# EAGLE board Y-babies -- PicAxe v.1.3 (EAGLE 6.5.0)
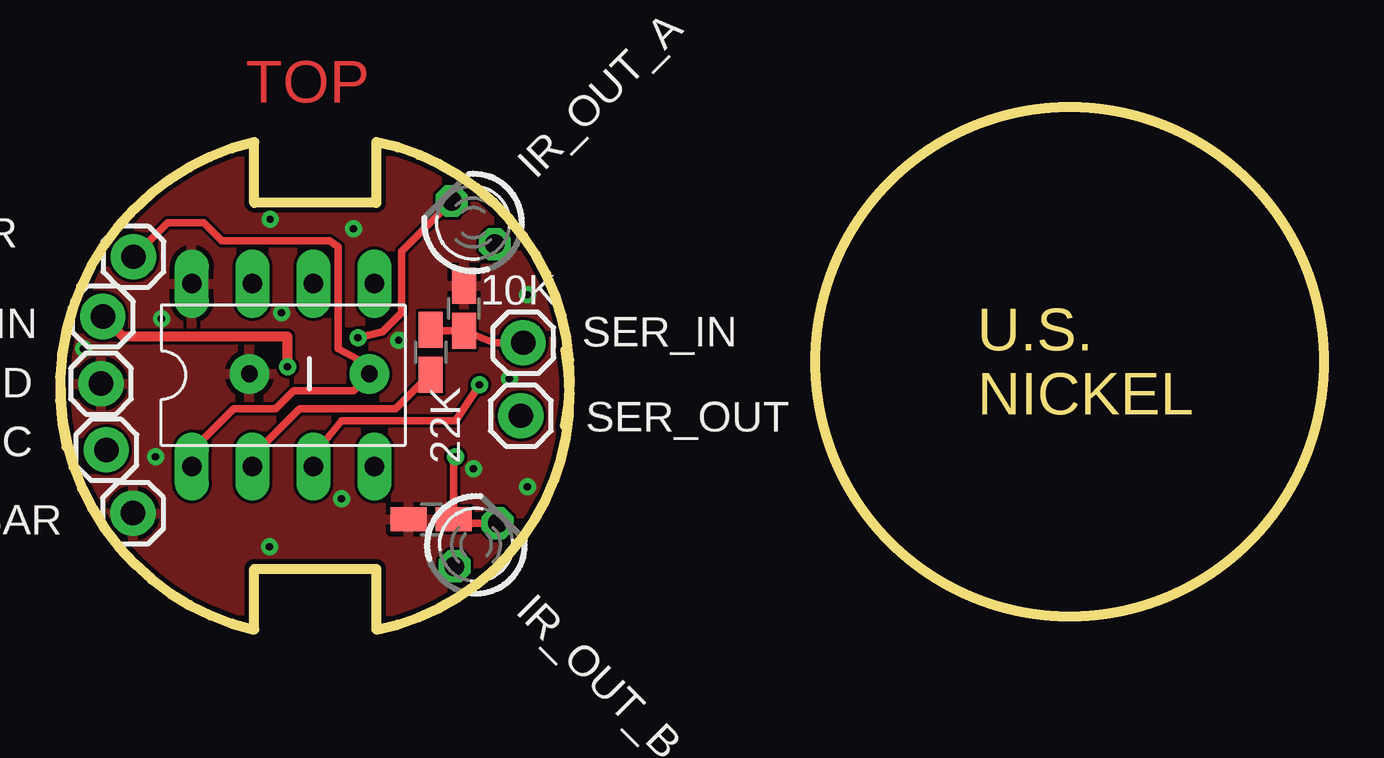
[diagram p0: board, top side]
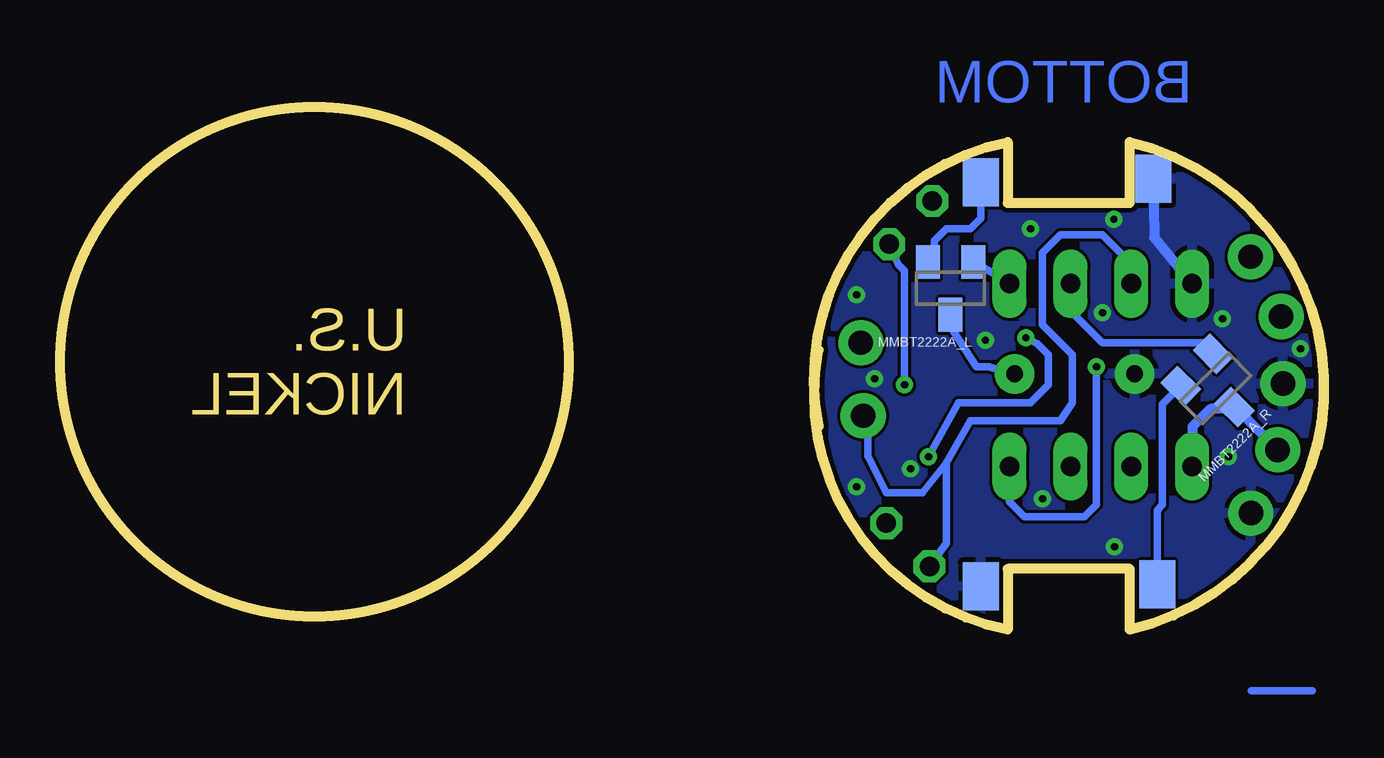
[diagram p1: board, bottom side, seen from below]

Size 52.69 x 21.77 mm. Coordinates in mm from the lower left corner, seen from the top.
Outline: 0.27,7.62 arc-90 8.1,20.32 8.1,17.78 13.18,17.78 13.18,20.32 arc-90 21.06,8.46
Outline: 0.27,12.48 arc90 8.1,0 8.1,2.54 13.18,2.54 13.18,0 arc90 21.07,11.66
Outline: circle at 42.08,11.16 radius 10.61
Copper layers (1*16): Top 0.035mm / dielectric 1.5mm / Bottom 0.035mm
Design rules "default *": minimum track width 10mil, minimum drill 24mil, track to track 5mil, track to pad 5mil, pad to pad 5mil, via to via 5mil, smd to smd 5mil, copper to edge 8mil, drill to drill 6mil, minimum pad ring 10mil, minimum via ring 8mil, stop-mask expansion 4mil, vias tented up to drill 0.3mm, thermal gap 8mil

## Footprints (pad centres in the part's own frame; a part is rotated, then mirrored left to right if it is on the bottom)
R0805W = smd 1.5 x 1: 1 -0.94,0; 2 0.94,0
CAP-PTH-5MM = drill 0.7 pad 1.651: 1 -2.5,0; 2 2.5,0
1X01 = drill 1.016 pad 1.88: 1 0,0
LED3MM = drill 0.813 octagon: A -1.27,0; K 1.27,0
SOT23 = smd 1 x 1.4: 1 -0.95,-1.1; 2 0.95,-1.1; 3 0,1.1
PAD-1.5X4.5 = smd 1.5 x 2: P$1 0,0
DIL8 = drill 0.813 pad 1.422 long: 1 -3.81,-3.81; 2 -1.27,-3.81; 3 1.27,-3.81; 4 3.81,-3.81; 5 3.81,3.81; 6 1.27,3.81; 7 -1.27,3.81; 8 -3.81,3.81

## Placement (x,y rotation side)
10K  [R0805W]  16.84,13.39 90 top
22K  [R0805W]  15.46,11.56 90 top
C1  [CAP-PTH-5MM]  10.39,10.66 0 top
GND  M01PTH  [1X01]  1.71,10.26 0 top
GND_BAR  M01PTH  [1X01]  3.04,4.86 0 top
IR_IN  M01PTH  [1X01]  1.79,13.05 0 top
IR_OUT_A  [LED3MM]  17.22,16.96 135 top
IR_OUT_B  [LED3MM]  17.34,3.54 45 top
MMBT2222A_L  [SOT23]  15.57,14.22 180 bottom
MMBT2222A_R  [SOT23]  4.51,10.05 225 bottom
MOT_1_A  M01SMD-4.5X1.5  [PAD-1.5X4.5]  7.12,18.78 0 bottom
MOT_1_B  M01SMD-4.5X1.5  [PAD-1.5X4.5]  14.29,18.65 180 bottom
MOT_2_A  M01SMD-4.5X1.5  [PAD-1.5X4.5]  6.96,1.89 180 bottom
MOT_2_B  M01SMD-4.5X1.5  [PAD-1.5X4.5]  14.31,1.81 0 bottom
PICAXE-08M2  PICAXE-08M2  [DIL8]  9.3,10.61 0 top
R2  [R0805W]  15.48,4.6 180 top
SER_IN  M01PTH  [1X01]  19.31,11.96 0 top
SER_OUT  M01PTH  [1X01]  19.21,8.92 0 top
VCC  M01PTH  [1X01]  1.93,7.49 0 top
VCC_BAR  M01PTH  [1X01]  3.06,15.54 0 top

## Library data of the parts
10K 22K R2 = resistor
C1 GND GND_BAR IR_IN MMBT2222A_L MMBT2222A_R MOT_1_A MOT_1_B MOT_2_A MOT_2_B SER_IN SER_OUT VCC VCC_BAR = SparkFun
IR_OUT_A IR_OUT_B = led
PICAXE-08M2 = picaxe-3

## Nets
GND: 10K.2 C1.1 GND.1 GND_BAR.1 MOT_1_A.P$1 MOT_2_B.P$1 PICAXE-08M2.8 R2.2
N$1: MMBT2222A_L.1 PICAXE-08M2.5
N$2: MMBT2222A_R.1 PICAXE-08M2.6
N$3: IR_OUT_B.A PICAXE-08M2.7 SER_OUT.1
N$5: 10K.1 22K.2 SER_IN.1
N$6: IR_OUT_A.A PICAXE-08M2.3
N$7: IR_OUT_A.K IR_OUT_B.K R2.1
N$8: 22K.1 PICAXE-08M2.2
N$9: MMBT2222A_L.2 MOT_1_B.P$1
N$10: MMBT2222A_R.2 MOT_2_A.P$1
N$11: IR_IN.1 PICAXE-08M2.4
VCC: C1.2 MMBT2222A_L.3 MMBT2222A_R.3 PICAXE-08M2.1 VCC.1 VCC_BAR.1

## Tracks (layer width: path | path; a pad name or v marks a point on that pad's centre or on a via)
GND  (via drill 0.3)
  Bottom 0.406: MOT_1_A.P$1 7.08,16.35 PICAXE-08M2.8
  other vias: 8.73,3.46 0.98,11.71 19.48,5.96 12.23,16.71 19.48,13.96 4.23,12.96 8.76,17.11 11.73,5.46 3.98,7.21 18.73,10.46 17.23,6.71 14.11,12.06 9.23,13.21
  pour Bottom: -0.79,20.32 -0.79,0 22.07,0 22.07,20.32
  pour Top: -0.79,20.32 -0.79,0 22.07,0 22.07,20.32
N$1
  Bottom 0.305: MMBT2222A_L.1 13.71,14.81 PICAXE-08M2.5
N$2
  Bottom 0.305: PICAXE-08M2.6 10.57,13.3 9.23,11.96 5.08,11.96 MMBT2222A_R.1
N$3
  Bottom 0.305: PICAXE-08M2.7 8.03,15.26 9.23,16.46 10.98,16.46 11.73,15.71 11.73,12.71 10.48,11.46 10.48,9.46 10.98,8.71 14.73,8.71 15.73,6.96 | SER_OUT.1 19,8.71 19,7.23 18.23,5.71 16.73,5.71 15.73,6.96 | 15.73,6.96 15.73,3.6 IR_OUT_B.A
N$4
  Bottom 0.305: 0.48,-2.54 3.02,-2.54
N$5
  Top 0.305: SER_IN.1 18.08,11.95 10K.1 15.51,12.45 22K.2
N$6  (via drill 0.3)
  Top 0.305: PICAXE-08M2.3 10.57,7.3 11.73,8.71 16.48,8.71 v17.48,10.21
  Bottom 0.305: v17.48,10.21 17.48,14.96 17.73,15.2 IR_OUT_A.A
N$7  (via drill 0.3)
  Top 0.305: IR_OUT_B.K 16.58,4.44 R2.1 16.42,6.89 v16.48,7.21 | v12.42,12.17 13.44,12.42 14.23,13.21 14.23,15.77 IR_OUT_A.K
  Bottom 0.305: v12.42,12.17 11.94,11.92 11.48,11.46 11.48,10.21 12.23,9.46 15.23,9.46 v16.48,7.21
N$8
  Top 0.305: PICAXE-08M2.2 8.03,7.26 9.98,9.21 13.98,9.21 15.23,10.46 15.3,10.46 22K.1
N$9
  Bottom 0.305: MOT_1_B.P$1 14.29,17.15 14.73,16.71 15.73,16.71 16.23,16.21 16.23,15.61 MMBT2222A_L.2
N$10
  Bottom 0.305: MOT_2_A.P$1 6.96,4.99 6.73,5.21 6.73,9.39 MMBT2222A_R.2
N$11  (via drill 0.3)
  Top 0.406: v9.48,10.96 9.48,12.21 2.63,12.21 IR_IN.1
  Bottom 0.305: PICAXE-08M2.4 13.11,5.33 12.48,4.71 9.98,4.71 9.48,5.21 v9.48,10.96
VCC
  Top 0.305: 12.98,10.71 12.98,10.96 11.59,11.71 11.59,15.96 11.23,16.21 6.73,16.21 5.98,16.96 4.48,16.96 VCC_BAR.1 | 5.48,7.46 7.23,9.21 8.98,9.21 9.73,9.96 12.23,9.96 12.98,10.71 | 12.98,10.71 12.94,10.71 C1.2
  Top 0.406: PICAXE-08M2.1 5.49,7.45 5.48,7.46
  Bottom 0.305: MMBT2222A_L.3 15.45,12.43 14.48,10.96 13.98,10.96 | 13.98,10.96 13.94,10.96 | C1.2 12.93,10.66 13.98,10.96 | VCC_BAR.1 2.73,14.84 | MMBT2222A_R.3 3.74,9.2
  Bottom 0.406: VCC.1 3.64,9.2 3.74,9.2 4.74,9.2 5.48,8.46 PICAXE-08M2.1

## Text on the board
Top: TOP
Bottom: BOTTOM
Dimension: U.S. / NICKEL